# EAGLE board MacroPad (EAGLE 9.6.2)
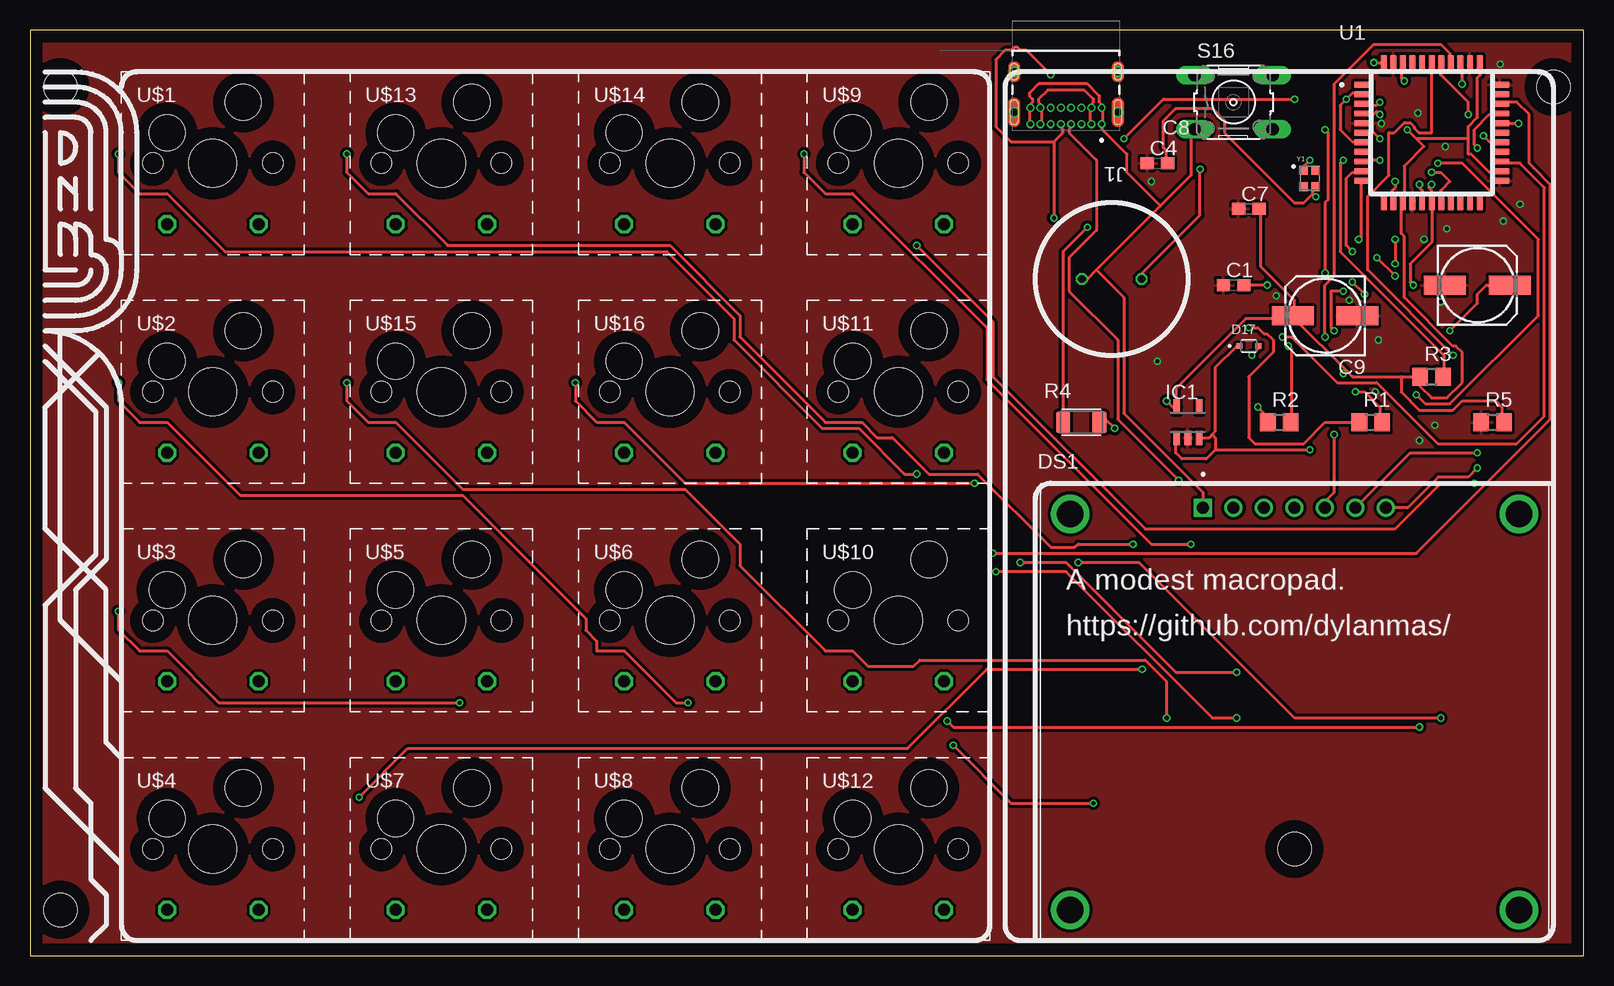
[diagram p0: board, top side]
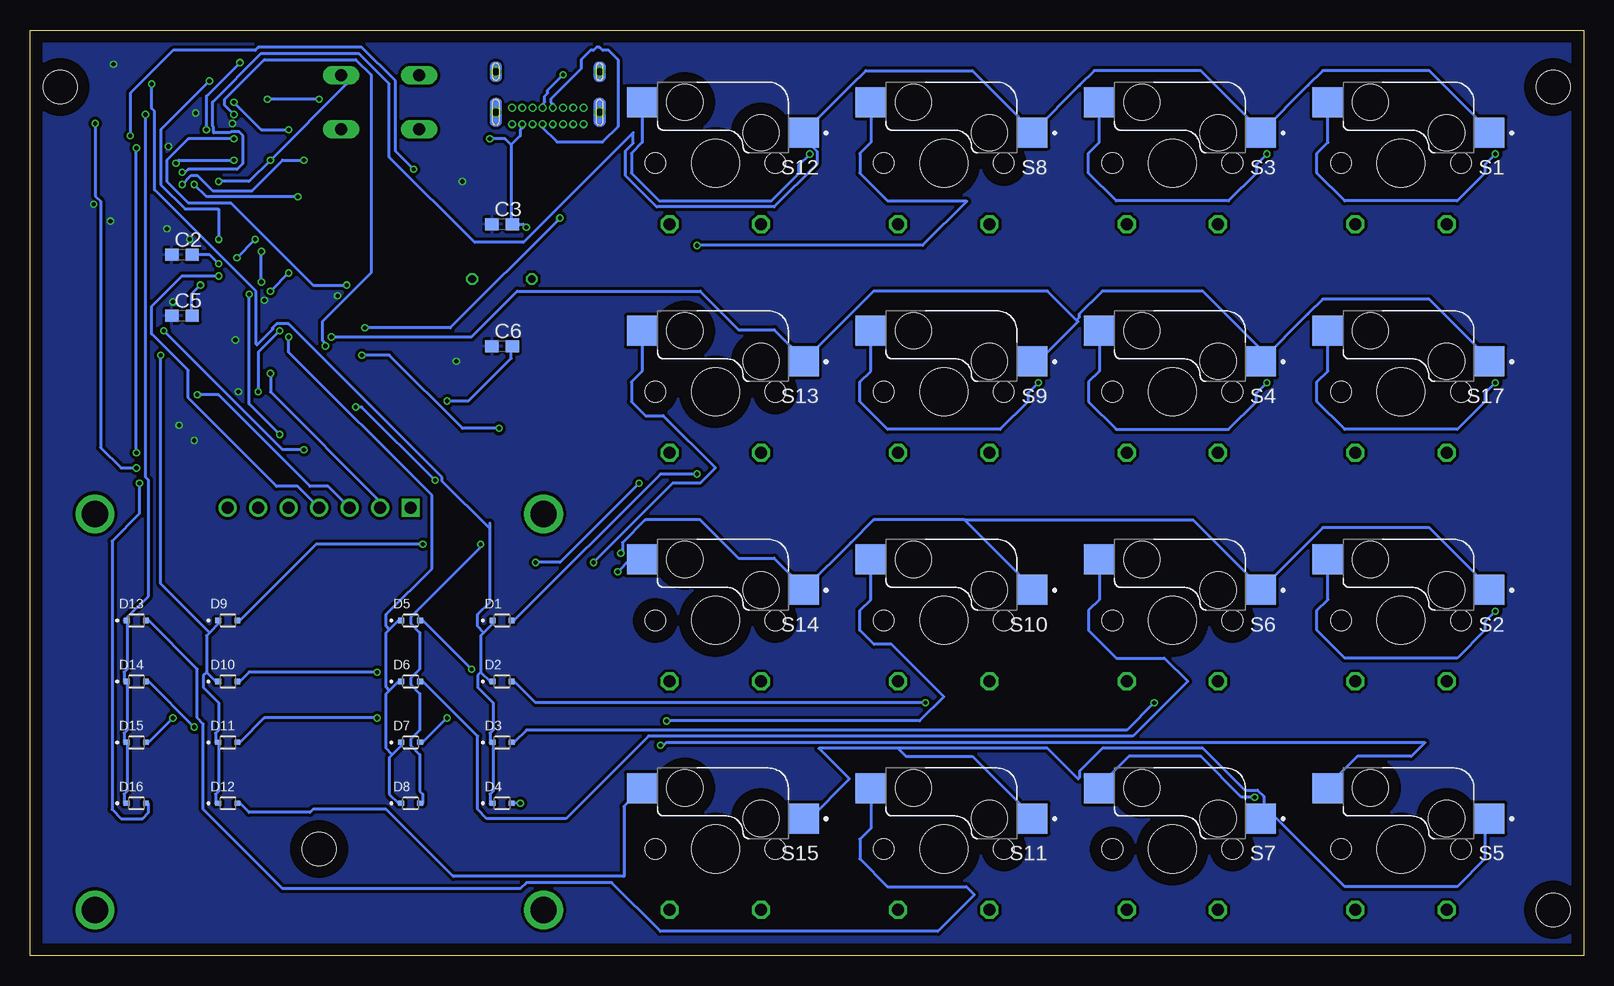
[diagram p1: board, bottom side, seen from below]

Size 129.52 x 77.14 mm. Coordinates in mm from the lower left corner, seen from the top.
Outline: 0,0 129.52,0 129.52,77.14 0,77.14 0,0
Copper layers (1*16): Top 0.035mm / dielectric 1.5mm / Bottom 0.035mm
Design rules "default *": minimum track width 10mil, minimum drill 0.35mm, track to track 10mil, track to pad 10mil, pad to pad 6mil, via to via 6mil, smd to smd 6mil, copper to edge 40mil, drill to drill 6mil, minimum pad ring 5mil, minimum via ring 5mil, stop-mask expansion 4mil, vias tented up to drill 0mil, thermal gap 10mil
Holes 2.8 mm at 2.54,72.39 2.54,3.81 127,72.39 105.41,8.89

## Footprints (pad centres in the part's own frame; a part is rotated, then mirrored left to right if it is on the bottom)
C0603 = smd 1.1 x 1: 1 -0.85,0; 2 0.85,0
153CLV-0605 = smd 3.5 x 1.6: + 2.7,0; - -2.7,0
SODFL1608X70N = smd 0.53 x 0.4: A 0.8,0; C -0.8,0
LCD_AOM12864A0-1.54WW-ANO = drill 1 square: 1 -7.62,17 | drill 1: 2 -5.08,17; 3 -2.54,17; 4 0,17; 5 2.54,17; 6 5.08,17; 7 7.62,17 | drill 2.2: P1 -18.7,16.5; P2 18.7,16.5; P3 -18.7,-16.5; P4 18.7,-16.5
SOT23-5 = smd 0.55 x 1.2: 1 -0.95,-1.3; 2 0,-1.3; 3 0.95,-1.3; 4 0.95,1.3; 5 -0.95,1.3
GCT_USB4085-GF-A_REVA4 = drill 0.4 pad 0.65: A1 -2.975,4.36; A4 -2.125,4.36; A5 -1.275,4.36; A6 -0.425,4.36; A7 0.425,4.36; A8 1.275,4.36; A9 2.125,4.36; A12 2.975,4.36; B1 2.975,3.01; B4 2.125,3.01; B5 1.275,3.01; B6 0.425,3.01; B7 -0.425,3.01; B8 -1.275,3.01; B9 -2.125,3.01; B12 -2.975,3.01 | drill 0.6 pad 0.9: S1 -4.325,0; S2 4.325,0; S3 -4.325,3.38; S4 4.325,3.38
R0805 = smd 1.3 x 1.5: 1 -0.95,0; 2 0.95,0
RESC3216X125N = smd 1.2 x 1.82: 1 -1.505,0; 2 1.505,0
SW_PG151101S11 = smd 2.55 x 2.5: 1 -6.725,1.27; 2 6.725,-1.27 | hole 3: 3.175,-1.27; -3.175,1.27
B3F-10XX = drill 1.016 long: 1 -3.251,2.261; 2 3.251,2.261; 3 -3.251,-2.261; 4 3.251,-2.261
QFP80P1200X1200X120-44N = smd 1.6 x 0.55: 1 -5.68,4; 2 -5.68,3.2; 3 -5.68,2.4; 4 -5.68,1.6; 5 -5.68,0.8; 6 -5.68,0; 7 -5.68,-0.8; 8 -5.68,-1.6; 9 -5.68,-2.4; 10 -5.68,-3.2; 11 -5.68,-4; 23 5.68,-4; 24 5.68,-3.2; 25 5.68,-2.4; 26 5.68,-1.6; 27 5.68,-0.8; 28 5.68,0; 29 5.68,0.8; 30 5.68,1.6; 31 5.68,2.4; 32 5.68,3.2; 33 5.68,4 | smd 0.55 x 1.6: 12 -4,-5.68; 13 -3.2,-5.68; 14 -2.4,-5.68; 15 -1.6,-5.68; 16 -0.8,-5.68; 17 0,-5.68; 18 0.8,-5.68; 19 1.6,-5.68; 20 2.4,-5.68; 21 3.2,-5.68; 22 4,-5.68; 34 4,5.68; 35 3.2,5.68; 36 2.4,5.68; 37 1.6,5.68; 38 0.8,5.68; 39 0,5.68; 40 -0.8,5.68; 41 -1.6,5.68; 42 -2.4,5.68; 43 -3.2,5.68; 44 -4,5.68
CHERRY_MX1A-11NN_SWITCH = drill 1 octagon: BR1 -3.81,-5.08; BR2 3.81,-5.08 | drill 1.5 octagon: P$1 2.51,5.08; P$2 -3.81,2.54 | hole 3.988: 0,0 | hole 1.7: 5,0; -5,0
PT-1307 = drill 0.65 octagon: P$1 -2.489,0; P$2 2.489,0
OSC_XRCGB16M000FXN00R0 = smd 0.7 x 0.75: 1 -0.5,0.675; 2 -0.5,-0.675; 3 0.5,-0.675; 4 0.5,0.675

## Placement (x,y rotation side)
C1  1uF  [C0603]  100.33,55.88 0 top
C2  0.1uF  [C0603]  116.84,58.42 0 bottom
C3  1uF  [C0603]  90.17,60.96 0 bottom
C4  12pF  [C0603]  93.98,66.04 0 top
C5  12pF  [C0603]  116.84,53.34 0 bottom
C6  1uF  [C0603]  90.17,50.8 0 bottom
C7  0.1uF  [C0603]  101.6,62.23 0 top
C8  10uF  [153CLV-0605]  120.65,55.88 0 top
C9  10uF  [153CLV-0605]  107.95,53.34 180 top
D1  1N4148WT  [SODFL1608X70N]  90.17,27.94 0 bottom
D2  1N4148WT  [SODFL1608X70N]  90.17,22.86 0 bottom
D3  1N4148WT  [SODFL1608X70N]  90.17,17.78 0 bottom
D4  1N4148WT  [SODFL1608X70N]  90.17,12.7 0 bottom
D5  1N4148WT  [SODFL1608X70N]  97.79,27.94 0 bottom
D6  1N4148WT  [SODFL1608X70N]  97.79,22.86 0 bottom
D7  1N4148WT  [SODFL1608X70N]  97.79,17.78 0 bottom
D8  1N4148WT  [SODFL1608X70N]  97.79,12.7 0 bottom
D9  1N4148WT  [SODFL1608X70N]  113.03,27.94 0 bottom
D10  1N4148WT  [SODFL1608X70N]  113.03,22.86 0 bottom
D11  1N4148WT  [SODFL1608X70N]  113.03,17.78 0 bottom
D12  1N4148WT  [SODFL1608X70N]  113.03,12.7 0 bottom
D13  1N4148WT  [SODFL1608X70N]  120.65,27.94 0 bottom
D14  1N4148WT  [SODFL1608X70N]  120.65,22.86 0 bottom
D15  1N4148WT  [SODFL1608X70N]  120.65,17.78 0 bottom
D16  1N4148WT  [SODFL1608X70N]  120.65,12.7 0 bottom
D17  1N4148WT  [SODFL1608X70N]  101.6,50.8 0 top
DS1  AOM12864A0-1.54WW-ANO  [LCD_AOM12864A0-1.54WW-ANO]  105.41,20.32 0 top
IC1  MIC5219BM5  [SOT23-5]  96.52,44.45 0 top
J1  USB4085-GF-A_REVA4  [GCT_USB4085-GF-A_REVA4]  86.36,73.66 180 top
R1  22  [R0805]  111.76,44.45 0 top
R2  22  [R0805]  104.14,44.45 0 top
R3  10k  [R0805]  116.84,48.26 0 top
R4  0ZCJ0050FF2G  [RESC3216X125N]  87.63,44.45 0 top
R5  10k  [R0805]  121.92,44.45 0 top
S1  PG151101S11  [SW_PG151101S11]  14.61,69.85 180 bottom
S2  PG151101S11  [SW_PG151101S11]  14.61,31.75 180 bottom
S3  PG151101S11  [SW_PG151101S11]  33.66,69.85 180 bottom
S4  PG151101S11  [SW_PG151101S11]  33.66,50.8 180 bottom
S5  PG151101S11  [SW_PG151101S11]  14.61,12.7 180 bottom
S6  PG151101S11  [SW_PG151101S11]  33.66,31.75 180 bottom
S7  PG151101S11  [SW_PG151101S11]  33.66,12.7 180 bottom
S8  PG151101S11  [SW_PG151101S11]  52.7,69.85 180 bottom
S9  PG151101S11  [SW_PG151101S11]  52.7,50.8 180 bottom
S10  PG151101S11  [SW_PG151101S11]  52.7,31.75 180 bottom
S11  PG151101S11  [SW_PG151101S11]  52.7,12.7 180 bottom
S12  PG151101S11  [SW_PG151101S11]  71.75,69.85 180 bottom
S13  PG151101S11  [SW_PG151101S11]  71.75,50.8 180 bottom
S14  PG151101S11  [SW_PG151101S11]  71.75,31.75 180 bottom
S15  PG151101S11  [SW_PG151101S11]  71.75,12.7 180 bottom
S16  [B3F-10XX]  100.33,71.12 0 top
S17  PG151101S11  [SW_PG151101S11]  14.61,50.8 180 bottom
U1  ATMEGA32U4-AUR  [QFP80P1200X1200X120-44N]  116.84,68.58 0 top
U$1  MX1A-11NN  [CHERRY_MX1A-11NN_SWITCH]  15.24,66.04 0 top
U$2  MX1A-11NN  [CHERRY_MX1A-11NN_SWITCH]  15.24,46.99 0 top
U$3  MX1A-11NN  [CHERRY_MX1A-11NN_SWITCH]  15.24,27.94 0 top
U$4  MX1A-11NN  [CHERRY_MX1A-11NN_SWITCH]  15.24,8.89 0 top
U$5  MX1A-11NN  [CHERRY_MX1A-11NN_SWITCH]  34.29,27.94 0 top
U$6  MX1A-11NN  [CHERRY_MX1A-11NN_SWITCH]  53.34,27.94 0 top
U$7  MX1A-11NN  [CHERRY_MX1A-11NN_SWITCH]  34.29,8.89 0 top
U$8  MX1A-11NN  [CHERRY_MX1A-11NN_SWITCH]  53.34,8.89 0 top
U$9  MX1A-11NN  [CHERRY_MX1A-11NN_SWITCH]  72.39,66.04 0 top
U$10  MX1A-11NN  [CHERRY_MX1A-11NN_SWITCH]  72.39,27.94 0 top
U$11  MX1A-11NN  [CHERRY_MX1A-11NN_SWITCH]  72.39,46.99 0 top
U$12  MX1A-11NN  [CHERRY_MX1A-11NN_SWITCH]  72.39,8.89 0 top
U$13  MX1A-11NN  [CHERRY_MX1A-11NN_SWITCH]  34.29,66.04 0 top
U$14  MX1A-11NN  [CHERRY_MX1A-11NN_SWITCH]  53.34,66.04 0 top
U$15  MX1A-11NN  [CHERRY_MX1A-11NN_SWITCH]  34.29,46.99 0 top
U$16  MX1A-11NN  [CHERRY_MX1A-11NN_SWITCH]  53.34,46.99 0 top
U$17  PT-1307  [PT-1307]  90.17,56.39 0 top
Y1  XRCGB16M000FXN00R0  [OSC_XRCGB16M000FXN00R0]  106.68,64.77 0 top

## Library data of the parts
C1-C9 = rcl; SPICEPREFIX: C
D1-D17 = 1N4148WT; AVAILABILITY: In Stock; DESCRIPTION: Diode Standard 75 V 200mA Surface Mount SOD-523F; MF: ON Semiconductor; MP: 1N4148WT; PACKAGE: SOD-523-2 ON Semiconductor; PRICE: None; PURCHASE-URL: https://pricing.snapeda.com/search/part/1N4148WT/?ref=eda
DS1 = AOM12864A0-1.54WW-ANO; AVAILABILITY: In Stock; DESCRIPTION: Non-Touch Graphic LCD Display Module - White OLED SPI 1.54 (39.12mm) 128 x 64; MF: Orient Display; MP: AOM12864A0-1.54WW-ANO; PACKAGE: None; PRICE: None; PURCHASE-URL: https://pricing.snapeda.com/search/part/AOM12864A0-1.54WW-ANO/?ref=eda
IC1 = MIC5219BM5; AVAILABILITY: In Stock; DESCRIPTION: Linear Voltage Regulator IC Positive Adjustable 1 Output 500mA SOT-23-5; MF: Micrel; MP: MIC5219BM5; PACKAGE: SOT-753 Micrel; PRICE: None; PURCHASE-URL: https://pricing.snapeda.com/search/part/MIC5219BM5/?ref=eda
J1 = USB4085-GF-A_REVA4; AVAILABILITY: In Stock; DESCRIPTION: USB-C (USB TYPE-C) USB 2.0 Receptacle Connector 24 (16+8 Dummy) Position Through Hole, Right Angle, low cost, 3.46mm profile, 16 pin, horizontal, Top mount; MF: Global Connector Technology; MP: USB4085-GF-A; PACKAGE: None; PRICE: None; PURCHASE-URL: https://pricing.snapeda.com/search/part/USB4085-GF-A/?ref=eda
R1-R3 R5 = rcl; SPICEPREFIX: R
R4 = 0ZCJ0050FF2G; AVAILABILITY: In Stock; DESCRIPTION: 1206 SMT PPTC | 0.50 Ih | 8V; MF: Bel Fuse; MP: 0ZCJ0050FF2G; PACKAGE: 1206 Bel Fuse; PRICE: None; PURCHASE-URL: https://pricing.snapeda.com/search/part/0ZCJ0050FF2G/?ref=eda
S1-S15 S17 = PG151101S11; AVAILABILITY: Not in stock; MF: Kailh; MP: PG151101S11; PACKAGE: Package; PRICE: None
S16 = switch-omron; MPN: B3F-1000; OC_FARNELL: 176432; OC_NEWARK: 36M3542
U1 = ATMEGA32U4-AUR; AVAILABILITY: In Stock; DESCRIPTION: AVR AVR® ATmega Microcontroller IC 8-Bit 16MHz 32KB (16K x 16) FLASH 44-TQFP (10x10); MF: Microchip Technology; MP: ATMEGA32U4-AUR; PACKAGE: TQFP-44 Microchip; PRICE: None; PURCHASE-URL: https://pricing.snapeda.com/search/part/ATMEGA32U4-AUR/?ref=eda
U$1-U$16 = MX1A-11NN; AVAILABILITY: In Stock; DESCRIPTION: Pushbutton Switch SPST-NO Keyswitch Panel Mount, Front; MF: Cherry; MP: MX1A-11NN; PACKAGE: None; PRICE: None; PURCHASE-URL: https://pricing.snapeda.com/search/part/MX1A-11NN/?ref=eda
U$17 = PT-1307
Y1 = XRCGB16M000FXN00R0; AVAILABILITY: In Stock; DESCRIPTION: 16 MHz ±40ppm Crystal 6pF 200 Ohms 4-SMD, No Lead; MF: Murata Electronics; MP: XRCGB16M000FXN00R0; PACKAGE: SMD-4 Murata; PRICE: None; PURCHASE-URL: https://pricing.snapeda.com/search/part/XRCGB16M000FXN00R0/?ref=eda

## Nets
A0: D1.C D2.C D3.C D4.C U1.36
A1: D5.C D6.C D7.C D8.C U1.37
A2: D13.C D14.C D15.C D16.C U1.38
A3: D9.C D10.C D11.C D12.C U1.39
D2: U1.19
D3: S1.1 S3.1 S8.1 S12.1 U1.18
D4: S4.1 S9.1 S13.1 S17.1 U1.25
D5: S2.1 S6.1 S10.1 S14.1 U1.31
D6: S5.1 S7.1 S11.1 S15.1
D7: U1.27 U$17.P$2
D9: DS1.7 U1.29
D10: DS1.6 U1.30
D14: DS1.4 U1.11
D15: DS1.3 U1.9
D16: DS1.5 U1.10
DGND: DS1.1 J1.A1 J1.A12 J1.B1 J1.B12 S16.3 U$17.P$1
DN: R1.2 U1.3
DP: R2.2 U1.4
GND: C1.1 C2.1 C3.1 C4.1 C5.1 C6.1 C7.1 C8.- C9.- IC1.2 R5.1 U1.5 U1.15 U1.23 U1.33 U1.35 U1.43
N$1: D1.A S1.2
N$2: D2.A S17.2
N$3: D3.A S2.2
N$4: D4.A S5.2
N$5: D8.A S3.2
N$6: D7.A S4.2
N$7: D6.A S6.2
N$8: D5.A S7.2
N$9: D16.A S8.2
N$10: D15.A S9.2
N$11: D14.A S10.2
N$12: D13.A S11.2
N$13: D9.A S12.2
N$14: D10.A S13.2
N$15: D11.A S14.2
N$16: D12.A S15.2
N$17: D17.A R4.2
N$20: J1.A7 J1.B7 R1.1
N$21: J1.A6 J1.B6 R2.1
N$22: C1.2 U1.6
N$23: C2.2 U1.42
N$25: C8.+ D17.C IC1.1 IC1.3
RST: R3.2 S16.2 U1.13
UVCC: C3.2 J1.A4 J1.A9 J1.B4 J1.B9 R4.1 U1.2 U1.7
VCC: C6.2 C7.2 C9.+ DS1.2 IC1.5 R3.1 R5.2 U1.14 U1.24 U1.34 U1.44
XTAL1: C5.2 U1.17 Y1.1
XTAL2: C4.2 U1.16 Y1.3

## Tracks (layer width: path | path; a pad name or v marks a point on that pad's centre or on a via)
A0  (via drill 0.35)
  Top 0.254: v119.38,72.64 119.38,74.17 U1.36
  Bottom 0.254: D4.C 91.19,12.7 91.19,13.46 90.93,13.72 90.93,17.78 D3.C 91.19,17.78 91.19,18.54 90.93,18.8 90.93,21.08 92.2,22.35 92.2,23.37 91.95,23.62 | 91.95,23.62 91.19,22.86 D2.C | 91.95,23.62 91.95,26.67 91.69,26.92 | 91.69,26.92 90.93,27.69 90.93,27.94 D1.C | v119.38,72.64 119.38,70.61 119.13,70.36 119.13,63.81 110.67,55.36 110.67,50.98 110.59,50.9 109.29,52.21 109.29,52.31 108.95,52.65 107.96,52.65 95.18,39.86 95.18,39.55 91.19,35.56 | 91.19,35.56 91.19,29.46 92.2,28.45 92.2,27.43 91.69,26.92 | 91.19,35.56 91.19,36.07
A1  (via drill 0.35)
  Top 0.254: v107.95,51.56 107.95,55.88 108.71,56.64 108.71,72.64 112.01,75.95 117.6,75.95 118.36,75.18 118.36,74.42 U1.37
  Bottom 0.254: 99.31,16.76 98.55,17.53 98.55,17.78 D7.C | 99.31,16.76 99.57,16.51 99.57,13.46 98.81,12.7 D8.C | 99.57,22.1 99.82,21.84 99.82,17.27 99.31,16.76 | 99.57,22.1 98.81,22.86 D6.C | 99.57,27.18 99.82,26.92 99.82,22.35 99.57,22.1 | 99.57,27.18 98.81,27.94 D5.C | v107.95,51.56 107.95,50.29 96.01,38.35 96.01,32.26 99.82,28.45 99.82,27.43 99.57,27.18
A2  (via drill 0.35)
  Top 0.254: v119.89,70.1 119.89,71.12 117.6,73.41 117.6,74.17 U1.38
  Bottom 0.254: D16.C 121.67,12.7 121.67,13.46 121.41,13.72 121.41,17.78 D15.C 121.67,17.78 121.67,18.54 121.41,18.8 121.41,22.86 D14.C 121.67,22.86 121.67,23.62 121.41,23.88 121.41,27.94 D13.C 121.67,27.94 119.63,29.97 119.63,39.62 119.89,39.88 v119.89,70.1
A3  (via drill 0.35)
  Top 0.254: v118.62,50.04 111.51,57.15 111.51,63.25 113.28,65.02 113.28,68.58 113.73,68.58 114.57,69.42 115.05,69.42 115.39,69.08 115.39,68.97 115.78,68.58 116.84,68.58 U1.39
  Bottom 0.254: D12.C 114.05,12.7 114.05,13.46 113.79,13.72 113.79,17.78 D11.C 114.05,17.78 114.05,18.54 113.79,18.8 113.79,21.08 115.06,22.35 115.06,23.37 114.81,23.62 | 114.81,23.62 114.05,22.86 D10.C | 114.81,23.62 114.81,26.67 114.55,26.92 | 114.55,26.92 113.79,27.69 113.79,27.94 D9.C | v118.62,50.04 118.62,30.99 114.55,26.92
D3  (via drill 0.35)
  Top 0.254: v116.84,65.28 117.6,65.28 118.36,64.52 117.6,63.75 117.6,62.99 U1.18
  Bottom 0.254: v116.84,65.28 116.59,65.28 116.33,65.53 112.27,65.53 111.76,66.04 111.76,68.33 112.09,68.65 112.76,68.65 112.84,68.58 114.24,68.58 114.23,68.59 114.23,69.08 114.3,69.15 114.3,71.12 110.24,75.18 102.11,75.18 99.57,72.64 99.57,66.55 92.46,59.44 88.39,59.44 79.25,68.58 79.25,67.72 79.89,67.08 79.89,65 77.28,62.39 67.5,62.39 63.94,65.96 63.94,67.04 65.03,68.14 S12.1 61.09,72.52 61.09,72.53 59.85,73.76 50.98,73.76 45.92,68.71 45.85,68.71 | S1.1 8.79,69.49 8.79,69.67 12.88,73.76 21.75,73.76 22.99,72.53 22.99,72.52 S3.1 27.84,69.49 27.84,69.67 31.93,73.76 40.8,73.76 42.04,72.53 42.04,72.52 45.85,68.71 | 45.85,68.71 S8.1
D4  (via drill 0.35)
  Top 0.254: v104.39,51.56 105.16,51.56 108.97,47.75 112.27,47.75 117.35,42.67 123.95,42.67 126.24,44.96 126.24,64.01 124.21,66.04 122.68,66.04 U1.25
  Bottom 0.254: 42.29,52.96 42.16,52.83 45.47,49.53 S9.1 | 42.29,52.96 44.7,55.37 59.19,55.37 61.09,53.48 61.09,53.47 64.9,49.66 | v104.39,51.56 92.71,51.56 88.9,55.37 73.66,55.37 70.46,52.17 67.48,52.17 64.97,49.66 64.9,49.66 | 42.29,52.96 42.04,53.21 42.04,53.48 40.14,55.37 31.75,55.37 26.93,50.55 S4.1 22.99,53.47 22.99,53.48 21.75,54.71 12.88,54.71 8.79,50.62 8.79,50.44 S17.1 | 64.9,49.66 S13.1
D5  (via drill 0.35)
  Top 0.254: v80.26,33.53 115.57,33.53 126.75,44.7 126.75,64.26 125.35,65.66 124.97,66.04 124.97,70.1 123.95,71.12 122.68,71.12 U1.31
  Bottom 0.254: S2.1 8.79,31.39 8.79,31.57 12.88,35.66 21.75,35.66 22.99,34.43 22.99,34.42 S6.1 27.84,31.39 27.84,31.57 32.58,36.32 51.63,36.32 | S10.1 46.89,31.39 46.89,31.57 51.63,36.32 | 64.9,30.61 61.09,34.42 61.09,34.43 59.19,36.32 51.63,36.32 | 64.9,30.61 S14.1 | 64.9,30.61 64.97,30.61 67.48,33.12 70.46,33.12 73.66,36.32 78.24,36.32 80.14,34.43 80.14,33.66 v80.26,33.53
D6
  Bottom 0.254: 57.15,17.27 44.7,17.27 42.16,14.73 42.04,14.86 42.04,15.38 40.14,17.27 31.75,17.27 28.27,13.79 27.19,13.79 26.67,13.27 26.67,11.43 | S5.1 8.25,11.06 8.25,8.06 10.56,5.75 19.92,5.75 25.6,11.43 26.67,11.43 | 26.67,11.43 S7.1 | 57.15,17.27 56.49,16.61 50.98,16.61 46.89,12.53 46.89,12.34 S11.1 | S15.1 64.52,11.43 61.21,14.73 63.75,17.27 57.15,17.27
D7  (via drill 0.35)
  Top 0.254: v121.16,68.33 121.67,67.82 122.43,67.82 U1.27 | v97.54,65.53 97.54,61.72 92.71,56.9 92.71,56.39 U$17.P$2
  Bottom 0.254: v121.16,68.33 121.16,71.88 117.6,75.44 110.74,75.44 110.49,75.69 101.85,75.69 99.06,72.9 99.06,67.06 v97.54,65.53
D9  (via drill 0.35)
  Top 0.254: U1.29 124.04,69.38 v124.08,69.34 | v120.65,40.64 119.89,39.88 117.39,39.88 114.83,37.32 DS1.7
  Bottom 0.254: v124.08,69.34 124.08,63.31 123.62,62.85 123.62,42.34 121.92,40.64 v120.65,40.64
D10  (via drill 0.35)
  Top 0.254: v120.65,67.31 120.4,67.56 120.4,68.83 121.67,70.1 122.43,70.1 U1.30 | v120.65,41.91 115.06,41.91 110.49,37.34 DS1.6
  Bottom 0.254: v120.65,41.91 v120.65,67.31
D14  (via drill 0.35)
  Top 0.254: v110.74,59.69 111,59.94 111,64.52 U1.11 | v113.79,56.64 v112.27,58.17
  Bottom 0.254: v112.27,58.17 v110.74,59.69 | v113.79,56.64 116.84,56.64 119.38,54.1 119.38,51.82 116.33,48.77 116.33,46.48 108.97,39.12 107.19,39.12 105.41,37.34 DS1.4
D15  (via drill 0.35)
  Top 0.254: v112.52,66.29 111.25,66.29 U1.9 | v117.35,66.04 119.38,66.04 125.73,59.69 125.73,53.34 118.36,45.97 116.33,45.97 v115.57,46.74
  Bottom 0.254: v112.52,66.29 117.09,66.29 v117.35,66.04 | v115.57,46.74 113.79,46.74 106.17,39.12 104.65,39.12 102.87,37.34 DS1.3
D16  (via drill 0.35)
  Top 0.254: v110.24,58.67 109.73,59.18 109.73,64.77 110.24,65.28 111,65.28 U1.10 | v111.25,55.12 v110.24,56.13 | v108.71,43.43 108.71,38.61 107.95,37.85 DS1.5
  Bottom 0.254: v110.24,56.13 v110.24,58.67 | v111.25,55.12 111.25,45.97 v108.71,43.43
DGND
  Top 0.254: J1.A12 83.31,69.34 83.31,70.61 J1.B1 83.31,70.87 83.57,71.12 83.57,71.37 83.31,71.63 83.31,71.88 84.07,72.64 88.14,72.64 89.15,71.63 89.15,71.12 89.41,70.87 J1.B12 89.41,70.61 89.41,69.34 J1.A1 89.41,69.09 89.41,68.83 91.44,66.8 91.44,65.28 94.23,62.48 | U$17.P$1 88.14,56.39 88.9,57.15 | 94.23,62.48 96.77,65.02 96.77,68.58 97.03,68.83 S16.3 | 94.23,62.48 88.9,57.15 | DS1.1 97.79,38.61 91.19,45.21 91.19,54.86 88.9,57.15
DN  (via drill 0.35)
  Top 0.254: v110.49,46.99 111.25,46.99 112.52,45.72 112.52,44.45 R1.2 | v108.71,52.07 108.46,52.32 108.46,55.37 v109.47,55.37 | v107.95,56.9 107.95,62.74 108.2,62.99 108.2,68.58 v107.95,68.83 | v112.52,71.12 112.27,70.87 111.25,70.87 U1.3
  Bottom 0.254: v110.49,46.99 110.49,50.29 v108.71,52.07 | v107.95,56.9 v109.47,55.37 | v107.95,68.83 110.24,68.83 v112.52,71.12
DP  (via drill 0.35)
  Top 0.254: v104.9,50.8 105.16,50.55 105.16,44.45 R2.2 | v112.52,70.1 112.27,70.36 112.01,70.1 111.25,70.1 U1.4
  Bottom 0.254: v104.9,50.8 104.9,51.05 105.16,51.31 105.16,52.83 101.09,56.9 101.09,73.41 102.36,74.68 109.98,74.68 113.28,71.37 113.28,70.87 v112.52,70.1
GND  (via drill 0.35)
  other vias: 93.47,64.52 109.98,54.61 103.89,54.99 112.39,51.31 112.14,46.99 117.09,44.2 115.82,42.93 124.21,62.61 122.81,61.21 112.65,69.34 117.6,54.48 118.11,60.58 116.2,59.69 93.98,49.53 117.98,67.44 115.7,70.23 122.56,74.3
  pour Top: 0,76.2 0,0 129.54,0 129.54,76.2
  pour Bottom: 0,76.2 0,0 129.54,0 129.54,76.2
N$1  (via drill 0.35)
  Top 0.254: v73.91,40.13 72.9,40.13 69.09,43.94 66.04,43.94 58.67,51.31 58.67,53.09 53.09,58.67 16.26,58.67 11.43,63.5 9.14,63.5 7.37,65.28 v7.37,66.8
  Bottom 0.254: v73.91,40.13 76.96,40.13 89.15,27.94 D1.A | v7.37,66.8 8.25,65.92 8.25,65.21 10.56,62.9 19.92,62.9 22.23,65.21 22.23,66.87 21.33,67.77 S1.2
N$2  (via drill 0.35)
  Top 0.254: v54.86,21.08 53.85,21.08 49.53,25.4 47.24,25.4 47.24,26.22 46.35,27.11 46.35,28.07 36.07,38.35 17.53,38.35 11.43,44.45 9.14,44.45 7.37,46.23 v7.37,47.75
  Bottom 0.254: v54.86,21.08 87.38,21.08 89.15,22.86 D2.A | v7.37,47.75 8.25,46.87 8.25,46.16 10.56,43.85 19.92,43.85 22.23,46.16 22.23,47.82 21.33,48.72 S17.2
N$3  (via drill 0.35)
  Top 0.254: v35.81,21.08 15.75,21.08 11.43,25.4 9.14,25.4 7.37,27.18 v7.37,28.7
  Bottom 0.254: v35.81,21.08 38.1,18.8 88.14,18.8 89.15,17.78 D3.A | v7.37,28.7 8.25,27.82 8.25,27.11 10.56,24.8 19.92,24.8 22.23,27.11 22.23,28.77 21.33,29.67 S2.2
N$4  (via drill 0.35)
  Top 0.254: v88.65,12.7 81.79,12.7 v76.96,17.53
  Bottom 0.254: v88.65,12.7 D4.A | v76.96,17.53 76.71,17.53 76.45,17.78 13.21,17.78 14.38,16.61 18.88,16.61 20.42,15.07 20.42,14.88 S5.2
N$5  (via drill 0.35)
  Top 0.254: v91.95,34.29 87.38,34.29 87.12,34.04 85.09,34.04 78.99,40.13 74.93,40.13 71.88,43.18 70.61,43.18 69.34,44.45 66.29,44.45 59.18,51.56 59.18,53.34 53.34,59.18 34.8,59.18 30.48,63.5 28.19,63.5 26.42,65.28 v26.42,66.8
  Bottom 0.254: v91.95,34.29 91.95,34.04 97.79,28.19 97.79,27.69 97.03,26.92 97.03,23.88 97.79,23.11 97.79,22.61 97.03,21.84 97.03,18.8 97.79,18.03 97.79,17.53 97.03,16.76 97.03,13.72 96.77,13.46 96.77,12.7 D8.A | v26.42,66.8 27.3,65.92 27.3,65.21 29.61,62.9 38.97,62.9 41.28,65.21 41.28,66.87 40.38,67.77 S3.2
N$6  (via drill 0.35)
  Top 0.254: v94.74,19.81 94.74,22.86 92.96,24.64 74.17,24.64 73.66,24.13 69.85,24.13 68.58,25.4 66.29,25.4 59.18,32.51 59.18,34.29 54.61,38.86 36.07,38.86 30.48,44.45 28.19,44.45 26.42,46.23 v26.42,47.75
  Bottom 0.254: v94.74,19.81 96.77,17.78 D7.A | v26.42,47.75 27.3,46.87 27.3,46.16 29.61,43.85 38.97,43.85 41.28,46.16 41.28,47.82 40.38,48.72 S4.2
N$7
  Bottom 0.254: D6.A 96.77,22.86 92.2,18.29 92.2,12.19 91.44,11.43 84.84,11.43 77.98,18.29 37.59,18.29 33.02,22.86 34.96,24.8 38.97,24.8 41.28,27.11 41.28,28.77 40.38,29.67 S6.2
N$8  (via drill 0.35)
  Top 0.254: v92.71,23.88 79.76,23.88 73.15,17.27 31.5,17.27 v27.43,13.21
  Bottom 0.254: v92.71,23.88 96.77,27.94 D5.A | v27.43,13.21 28.52,13.21 31.93,16.61 37.92,16.61 39.47,15.07 39.47,14.88 S7.2
N$9  (via drill 0.35)
  Top 0.254: v120.4,39.37 117.6,39.37 113.79,35.56 92.96,35.56 80.26,48.26 80.26,52.83 v73.91,59.18
  Bottom 0.254: v120.4,39.37 120.4,36.83 122.68,34.54 122.68,12.19 121.92,11.43 120.14,11.43 119.63,11.94 119.63,12.7 D16.A | v73.91,59.18 55.12,59.18 51.44,62.86 51.47,62.9 58.02,62.9 60.33,65.21 60.33,66.87 59.43,67.77 S8.2
N$10  (via drill 0.35)
  Top 0.254: v117.6,19.81 105.41,19.81 92.46,32.77 v87.38,32.77 | v78.74,39.37 54.61,39.37 49.53,44.45 47.24,44.45 45.47,46.23 v45.47,47.75
  Bottom 0.254: v117.6,19.81 119.63,17.78 D15.A | v87.38,32.77 85.34,32.77 v78.74,39.37 | v45.47,47.75 46.35,46.87 46.35,46.16 48.66,43.85 58.02,43.85 60.33,46.16 60.33,47.82 59.43,48.72 S9.2
N$11  (via drill 0.35)
  Top 0.254: v115.82,19.05 76.96,19.05 v76.45,19.56
  Bottom 0.254: v115.82,19.05 119.63,22.86 D14.A | v76.45,19.56 55.37,19.56 53.34,21.59 57.7,25.95 59.17,25.95 60.33,27.11 60.33,28.77 59.43,29.67 S10.2
N$12
  Bottom 0.254: D13.A 119.63,27.94 115.57,23.88 115.57,19.81 115.06,19.3 115.06,12.19 108.46,5.59 88.65,5.59 88.14,6.1 81.03,6.1 76.96,2.03 53.85,2.03 50.8,5.08 51.47,5.75 58.02,5.75 60.33,8.06 60.33,9.72 59.43,10.62 S11.2
N$13  (via drill 0.35)
  Top 0.254: v96.77,34.29 93.47,34.29 79.76,48.01 79.76,52.32 68.58,63.5 66.29,63.5 64.52,65.28 v64.52,66.8
  Bottom 0.254: v96.77,34.29 105.66,34.29 112.01,27.94 D9.A | v64.52,66.8 65.4,65.92 65.4,65.21 67.71,62.9 77.07,62.9 79.38,65.21 79.38,66.87 78.48,67.77 S12.2
N$14  (via drill 0.35)
  Top 0.254: v100.58,23.62 95.5,23.62 86.36,32.77 v82.55,32.77
  Bottom 0.254: v100.58,23.62 111.25,23.62 112.01,22.86 D10.A | v82.55,32.77 75.95,39.37 73.66,39.37 72.39,40.64 76.75,45 78.22,45 79.38,46.16 79.38,47.82 78.48,48.72 S13.2
N$15  (via drill 0.35)
  Top 0.254: v100.58,19.81 98.55,19.81 86.36,32 v80.52,32
  Bottom 0.254: v100.58,19.81 109.98,19.81 112.01,17.78 D11.A | v80.52,32 79.5,33.02 S14.2
N$16
  Bottom 0.254: D12.A 112.01,12.7 111.25,11.94 106.17,11.94 105.92,12.19 99.82,12.19 94.23,6.6 80.01,6.6 80.01,12.44 S15.2
N$17  (via drill 0.35)
  Top 0.254: v101.85,50.04 102.36,50.55 102.36,50.8 D17.A | v90.42,43.94 89.66,44.7 89.41,44.7 89.15,44.45 R4.2
  Bottom 0.254: v101.85,50.04 99.57,50.04 93.47,43.94 v90.42,43.94
N$20  (via drill 0.35)
  Top 0.254: 85.34,67.82 86.11,68.58 86.11,68.83 85.85,69.09 J1.A7 | 85.34,67.82 81.79,67.82 80.52,69.09 80.52,74.68 81.28,75.44 81.79,75.44 82.04,75.69 82.3,75.69 82.55,75.44 83.06,75.44 v85.09,73.41 | R1.1 107.95,44.45 106.17,42.67 102.11,42.67 101.6,43.18 101.6,48.26 103.63,50.29 103.63,51.31 103.12,51.82 102.87,51.82 102.36,52.32 v101.6,52.32 | 85.34,67.82 v85.34,61.47
  Bottom 0.254: v85.09,73.41 86.36,72.14 86.36,71.88 86.61,71.63 86.61,71.12 86.87,70.87 J1.B7 | v101.6,52.32 94.49,52.32 v85.34,61.47
N$21  (via drill 0.35)
  Top 0.254: v102.36,45.72 103.12,44.96 103.12,44.45 R2.1 | v95.76,39.62 90.68,44.7 90.68,51.31 86.61,55.37 86.61,58.17 88.9,60.45 88.9,66.29 86.61,68.58 86.61,68.83 86.87,69.09 J1.A6
  Bottom 0.254: J1.B6 85.85,70.87 86.11,71.12 86.11,71.37 83.57,73.91 83.57,74.68 82.8,75.44 82.55,75.44 82.3,75.69 82.04,75.69 81.79,75.44 81.28,75.44 80.52,74.68 80.52,69.09 81.79,67.82 85.6,67.82 86.87,69.09 J1.A6 | v102.36,45.72 101.85,45.72 v95.76,39.62
N$22  (via drill 0.35)
  Top 0.254: v103.12,55.88 C1.2 | v112.52,68.07 112.01,68.58 U1.6
  Bottom 0.254: v103.12,55.88 105.92,55.88 112.78,62.74 116.33,62.74 118.11,64.52 118.11,66.29 116.33,68.07 v112.52,68.07
N$23  (via drill 0.35)
  Top 0.254: v113.79,59.69 v113.79,57.66 | v114.55,72.9 114.3,73.15 114.3,74.17 U1.42
  Bottom 0.254: C2.2 114.55,58.42 v113.79,57.66 | v113.79,59.69 113.79,62.23 116.59,62.23 118.62,64.26 118.62,68.83 v114.55,72.9
N$25  (via drill 0.35)
  Top 0.254: 98.55,43.43 98.3,43.18 97.54,43.18 IC1.3 | 98.55,43.43 98.81,43.69 98.81,49.02 100.58,50.8 D17.C | 98.81,42.16 98.04,41.4 96.01,41.4 95.5,41.91 95.5,42.93 IC1.1 | 98.81,42.16 98.81,43.18 98.55,43.43 | C8.+ 121.41,55.88 120.65,55.12 120.65,54.36 v118.36,52.07 | 98.81,42.16 v106.68,42.16
  Bottom 0.254: v118.36,52.07 108.46,42.16 v106.68,42.16
RST  (via drill 0.35)
  Top 0.254: v109.47,66.29 109.22,66.04 109.22,58.67 117.86,50.04 117.86,48.26 R3.2 | v113.79,64.52 113.79,64.01 113.54,63.75 113.54,62.99 U1.13
  Bottom 0.254: S16.2 103.38,73.15 103.12,72.9 103.12,72.64 v109.47,66.29 111.25,64.52 v113.79,64.52
UVCC  (via drill 0.35)
  Top 0.254: U1.7 111,67.82 110.24,67.82 109.22,68.83 109.22,70.87 v109.73,71.37 110.24,71.88 111,71.88 U1.2 | J1.A9 84.33,69.34 84.33,70.61 J1.B4 84.33,70.87 84.07,71.12 84.07,71.37 84.84,72.14 87.88,72.14 88.65,71.37 88.65,71.12 88.39,70.87 J1.B9 88.39,70.61 88.39,69.34 J1.A4 | v88.14,60.71 86.11,58.67 86.11,44.45 R4.1 | v105.41,71.37 94.49,71.37 v91.19,68.07
  Bottom 0.254: 89.41,67.56 89.41,60.96 C3.2 88.39,60.96 v88.14,60.71 | 89.41,67.56 88.65,68.33 88.65,68.83 88.39,69.09 J1.A4 | v105.41,71.37 v109.73,71.37 | v91.19,68.07 89.92,68.07 89.41,67.56
VCC  (via drill 0.35)
  Top 0.254: 119.89,68.07 115.57,68.07 | U1.24 122.43,65.28 121.67,65.28 120.14,66.8 119.89,66.8 119.89,68.07 | v112.01,74.42 112.78,74.42 U1.44 | 115.57,68.07 116.2,67.44 114.55,65.79 114.55,62.99 U1.14 114.3,62.74 114.3,60.2 114.55,59.94 114.55,54.86 118.62,50.8 118.87,50.8 119.38,50.29 119.38,47.75 118.11,46.48 116.84,46.48 115.82,47.5 115.82,48.26 | 115.57,68.07 v114.81,68.83 | 119.89,68.07 119.89,69.09 120.65,69.85 120.65,73.15 120.9,73.41 120.9,74.17 U1.34 | v94.74,46.23 95.5,45.47 95.76,45.72 IC1.5 95.5,45.97 95.5,47.24 101.35,53.09 105.41,53.09 | C7.2 102.62,62.23 102.62,57.4 105.41,54.61 105.41,53.34 C9.+ | 114.3,48.26 110.24,48.26 109.73,48.77 | 114.3,48.26 115.82,48.26 | 105.41,53.09 105.16,53.34 C9.+ | 105.41,53.09 109.73,48.77 | 114.3,48.26 114.3,46.99 115.82,45.47 118.62,45.47 119.38,46.23 122.17,46.23 122.68,45.72 122.68,44.45 R5.2 | 109.73,48.77 v109.47,48.51 | 105.41,53.09 C9.+ | 115.82,48.26 R3.1
  Bottom 0.254: v112.01,74.42 114.81,71.63 v114.81,68.83 | v94.74,46.23 92.96,46.23 89.41,49.78 89.41,50.8 C6.2 | DS1.2 100.33,37.85 109.47,46.99 v109.47,48.51
XTAL1  (via drill 0.35)
  Top 0.254: v106.68,66.29 106.17,65.79 106.17,65.53 Y1.1 | v116.84,64.26 116.59,64.01 116.84,63.75 U1.17 116.84,59.44 115.06,57.66 115.06,56.13 v115.32,55.88
  Bottom 0.254: v106.68,66.29 108.46,66.29 111,63.75 114.3,63.75 115.57,65.02 116.08,65.02 v116.84,64.26 | v115.32,55.88 116.08,55.12 116.08,53.34 C5.2
XTAL2  (via drill 0.35)
  Top 0.254: 106.93,63.5 106.93,64.01 Y1.3 | 106.93,63.5 106.17,62.74 105.41,62.74 99.57,68.58 99.57,69.6 98.55,70.61 95.5,70.61 94.49,69.6 94.49,67.31 94.74,67.06 94.74,66.04 C4.2 | v115.82,64.26 115.82,64.01 116.08,63.75 116.08,62.99 U1.16 | 106.93,63.5 v107.19,63.25
  Bottom 0.254: v115.82,64.26 114.81,63.25 v107.19,63.25

## Text on the board
tNames: A modest macropad. | https://github.com/dylanmas/